# Allegro board LAYOUT.brd
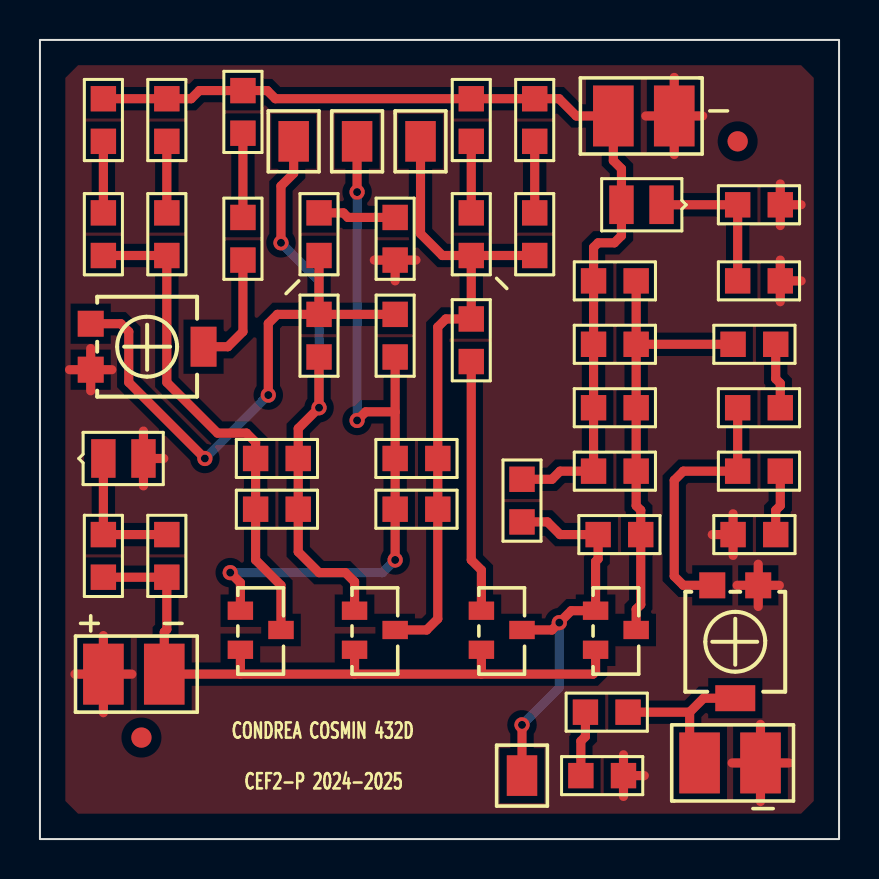
[diagram p0: board, top side]
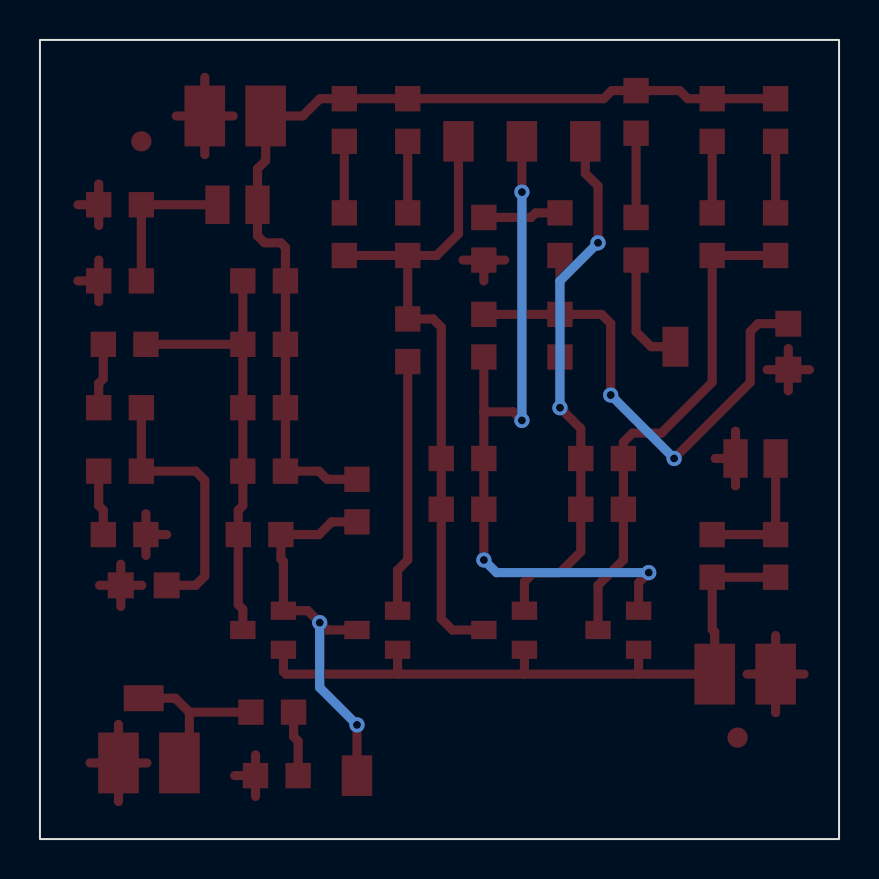
[diagram p1: board, bottom side, seen from below]

Outline 40 x 40 mm; copper layers: TOP, BOTTOM. Coordinates in mm from the lower left corner of the outline.
Outline path: rectangle 0,0 40,40

## Placement (name value [footprint] x y rotation side)
C1  1n  [SMC0805]  10.79 19.05 0 top
C2  1n  [SMC0805]  10.79 16.51 0 top
C3  1n  [SMC0805]  17.78 19.05 0 top
C4  1n  [SMC0805]  17.78 16.51 0 top
C5  47p  [SMC0805]  27.94 15.24 0 top
D1  1.85V  [SMD0805]  31.11 31.75 180 top
D2  1.85V  [SMD0805]  3.17 19.05 0 top
J1  CON1  [JUMPER1]  19.05 34.92 0 top
J2  CON1  [JUMPER1]  24.13 3.17 0 top
J3  CON1  [JUMPER1]  15.88 34.92 0 top
J4  CON1  [JUMPER1]  12.7 34.92 0 top
NOREF  -  []  40 0 90 top
NOREF#2  -  [unnamed#2]  5.08 5.08 0 top
NOREF#3  -  []  0 40 0 top
NOREF#4  -  [unnamed#2]  34.92 34.92 0 top
NOREF#5  -  []  0 0 90 top
NOREF#6  -  []  0 0 0 top
P1  10k  [TS53YL]  2.54 23.5 180 top
P2  100k  [TS53YL]  33.66 12.7 90 top
Q1  QBC817-25  [TO236]  10.16 11.43 180 top
Q2  QBC817-25  [TO236]  15.88 11.43 180 top
Q3  QBC846B  [TO236]  22.23 11.43 180 top
Q4  QBC846B  [TO236]  27.94 11.43 180 top
R1  1k  [SMR0805]  3.17 34.92 90 top
R2  1k  [SMR0805]  6.35 34.92 90 top
R3  1k  [SMR0805]  3.17 29.21 90 top
R4  1k  [SMR0805]  6.35 29.21 90 top
R5  8k200  [SMR0805]  13.97 24.13 90 top
R6  8k200  [SMR0805]  17.78 24.13 90 top
R7  1k  [SMR0805]  21.59 34.92 90 top
R8  1k  [SMR0805]  24.77 34.92 90 top
R9  1k  [SMR0805]  21.59 29.21 90 top
R10  1k  [SMR0805]  24.77 29.21 90 top
R11  100k  [SMR0805]  21.59 26.04 270 top
R12  3.3k  [SMR0805]  24.13 15.88 90 top
R13  3k9  [SMR0805]  29.84 27.94 180 top
R14  3k9  [SMR0805]  29.84 24.77 180 top
R15  3k9  [SMR0805]  29.84 21.59 180 top
R16  3k9  [SMR0805]  29.84 18.41 180 top
R17  10k  [SMR0805]  36.83 24.77 180 top
R18  8.2k  [SMR0805]  34.92 21.59 0 top
R19  15k  [SMR0805]  34.92 18.41 0 top
R20  10k  [SMR0805]  36.83 15.24 180 top
R21  330  [SMR0805]  10.16 37.47 270 top
R22  330  [SMR0805]  10.16 31.11 270 top
R23  3k3  [SMR0805]  13.97 29.21 90 top
R24  1k  [SMR0805]  17.78 31.11 270 top
R25  680  [SMR0805]  34.92 31.75 0 top
R26  680  [SMR0805]  34.92 27.94 0 top
R27  680  [SMR0805]  6.35 15.24 270 top
R28  680  [SMR0805]  3.17 15.24 270 top
RL1  6.8k  [SMR0805]  27.3 6.35 0 top
RL2  2.2k  [SMR0805]  29.21 3.17 180 top
VCC  CON2  [JUMPER2]  31.75 36.2 180 top
VO  CON2  [JUMPER2]  33.02 3.81 0 top
VSS  CON2  [JUMPER2]  3.17 8.26 0 top

## Library data of the parts
C1-C5 = C
D1 D2 = LED_0
J1-J4 = CON1: User Part Number: ***
P1 P2 = POT
Q1 Q2 = QBC817-25_0
Q3 Q4 = QBC846B_0
R1-R28 RL1 RL2 = R
VCC VO VSS = CON2: User Part Number: ***

## Footprints (pads in the part's own frame, mm; a bottom-side part is the same pattern mirrored in y, then rotated)
JUMPER1
  rect 1.524x2.032 smd: 1(0,0)
JUMPER2
  rect 2.032x3.048 smd: 1(0,0) 2(3.048,0)
SMC0805
  rect 1.27x1.27 smd: 1(0,0) 2(2.134,0)
SMD0805
  rect 1.219x1.93 smd: A(2.007,0) C(0,0)
SMR0805
  rect 1.27x1.27 smd: 1(0,0) 2(2.134,0)
TO236
  rect 1.27x0.914 smd: 1(0.127,0) 2(0.127,1.956) 3(-1.905,0.965)
TS53YL
  rect 1.3x1.3 smd: 1(0,0) 3(0,-2.3)
  rect 1.3x2 smd: 2(-5.65,-1.15)
unnamed#2
  round 1.016 smd: (0,0)

## Nets
VCC: D1.A(1) R1.2 R2.2 R7.2 R8.2 R12.2 R13.2 R14.2 R15.2 R16.2 R21.1 VCC.2
VSS: Q1.2 Q2.2 Q3.2 Q4.2 R27.2 R28.2 VSS.2
0: D2.A(1) P1.1 P2.3(2) R20.2 R24.2 R25.2 R26.2 RL2.1 VCC.1 VO.2 VSS.1
VO: P2.2(T) RL1.2 VO.1
VO1: C3.2 C4.2 J1.1 Q2.3 R9.1 R10.1 R11.1
VO2: Q3.1 R11.2
VO3: C5.1 J2.1 Q3.3 Q4.1 R12.1
VO4: C5.2 Q4.3 R13.1 R14.1 R15.1 R16.1 R17.2
N113110: D1.C(2) R25.1 R26.1
N113152: D2.C(2) R27.1 R28.1
N113324: R21.2 R22.1
N113400: P1.2(T) R22.2
N113538: P1.3(2) R5.2 R6.2 R23.1
N113756: R23.2 R24.1
N113810: R7.1 R9.2
N113816: R8.1 R10.2
N113844: R19.2 R20.1
N113900: R1.1 R3.2
N113906: R2.1 R4.2
N113998: P2.1 R18.1 R19.1
N114136: R17.1 R18.2
N114206: C1.1 C2.1 Q1.3 R3.1 R4.1
N114248: C1.2 C2.2 J4.1 Q2.1 R5.1
N114252: C3.1 C4.1 J3.1 Q1.1 R6.1
N114358: RL1.1 RL2.2

## Via types
v1: diameter 0.762, hole 0.4, TOP to BOTTOM, 10 vias

## Routing (per net, layer and track width the routed paths; a pad name or vN(x,y) marks a point on that pad's centre or on a via; arc(x,y) is an arc through that point)
VCC: length 49
  TOP w0.457: R1.2 R2.2 7.57,37.06 7.98,37.47 R21.1 11.38,37.47 11.79,37.06 R7.2 R8.2 25.98,37.06 26.85,36.2 VCC.2 28.7,33.96 29.11,33.55 D1.A 29.11,30.2 28.75,29.84 27.94,29.84 27.71,29.62 R13.2 R14.2 R15.2 R16.2 26.04,18.41 25.63,18.01 R12.2
VSS: length 34.5
  TOP w0.457: Q2.2 15.75,8.26 ; 15.75,8.26 22.1,8.26 ; 15.75,8.26 10.03,8.26 ; 22.1,8.26 Q3.2 ; 22.1,8.26 27.69,8.26 27.81,8.38 27.81,9.47 ; 10.03,8.26 VSS.2 6.22,10.36 6.35,10.49 R27.2 R28.2 ; 10.03,8.26 Q1.2
0: length 48
  TOP w0.457: 34.7,14.2 R20.2 ; R20.2 33.65,15.24 ; R20.2 34.7,16.28 ; 35.95,11.64 P2.3 ; P2.3 34.9,12.7 ; P2.3 35.95,13.76 ; P2.3 37.01,12.7 ; D2.A 6.2,19.05 ; D2.A 5.18,17.68 ; D2.A 5.18,20.42 ; VCC.1 33.17,36.2 ; VCC.1 30.33,36.2 ; VCC.1 31.75,34.26 ; VCC.1 31.75,38.13 ; R26.2 37.06,28.98 ; R26.2 37.06,26.9 ; R26.2 38.1,27.94 ; RL2.1 30.25,3.17 ; RL2.1 29.21,2.13 ; RL2.1 29.21,4.22 ; 1.75,8.26 VSS.1 ; VSS.1 4.6,8.26 ; VSS.1 3.17,6.32 ; VSS.1 3.17,10.19 ; P1.1 3.6,23.5 ; P1.1 2.54,24.55 ; P1.1 1.48,23.5 ; P1.1 2.54,22.44 ; R24.2 18.82,28.98 ; R24.2 16.74,28.98 ; R24.2 17.78,27.94 ; 36.07,1.88 VO.2 ; VO.2 36.07,5.74 ; VO.2 37.49,3.81 ; VO.2 34.65,3.81 ; 37.06,30.71 R25.2 ; R25.2 37.06,32.79 ; R25.2 38.1,31.75
VO: length 8.4
  TOP w0.457: P2.2 33.22,7.05 32.52,6.35 ; 32.52,6.35 32.52,4.94 33.02,4.44 VO.1 ; 32.52,6.35 RL1.2
VO1: length 32.8
  TOP w0.457: R9.1 R11.1 20.32,26.04 19.91,25.63 C3.2 C4.2 19.91,11.02 19.35,10.46 Q2.3 ; R9.1 20.14,29.21 19.05,30.3 J1.1 ; R9.1 R10.1
VO2: length 12.7
  TOP w0.457: Q3.1 22.1,13.46 21.59,13.97 R11.2
VO3: length 20.4
  TOP w0.457: R12.1 25.4,15.88 26.04,15.24 C5.1 27.94,14.02 27.81,13.89 27.81,11.43 26.59,11.43 v1(26,10.83) 25.63,10.46 Q3.3 ; v1(24.13,5.71) J2.1
  BOTTOM w0.457: v1(24.13,5.71) 26,7.58 v1(26,10.83)
VO4: length 22.5
  TOP w0.457: R17.2 R14.1 ; R14.1 R13.1 ; R14.1 R15.1 R16.1 29.84,16.69 30.07,16.46 C5.2 30.07,11.73 29.84,11.51 29.84,10.46
N113110: length 7.6
  TOP w0.457: R26.1 R25.1 D1.C
N113152: length 7
  TOP w0.457: D2.C R28.1 R27.1
N113324: length 4.2
  TOP w0.457: R21.2 R22.1
N113400: length 5.9
  TOP w0.457: R22.2 10.16,25.4 9.41,24.65 P1.2
N113538: length 27.6
  TOP w0.457: v1(8.26,19.05) 4.45,22.86 4.45,25.4 4.05,25.79 P1.3 ; v1(11.43,22.23) 11.43,25.81 11.89,26.26 R5.2 ; R23.1 R5.2 ; R5.2 R6.2
  BOTTOM w0.457: v1(8.26,19.05) v1(11.43,22.23)
N113756: length 3.9
  TOP w0.457: R23.2 15.19,31.34 15.42,31.11 R24.1
N113810: length 3.6
  TOP w0.457: R7.1 R9.2
N113816: length 3.6
  TOP w0.457: R8.1 R10.2
N113844: length 3.3
  TOP w0.457: R20.1 36.83,16.46 37.06,16.69 R19.2
N113900: length 3.6
  TOP w0.457: R1.1 R3.2
N113906: length 3.6
  TOP w0.457: R2.1 R4.2
N113998: length 13.4
  TOP w0.457: R18.1 R19.1 32.21,18.41 31.75,17.96 31.75,13.16 32.21,12.7 P2.1
N114136: length 3.3
  TOP w0.457: R17.1 36.83,23.04 37.06,22.81 R18.2
N114206: length 25.1
  TOP w0.457: Q1.3 12.06,12.7 10.79,13.97 C2.1 C1.1 10.79,19.86 10.34,20.32 8.89,20.32 6.35,22.86 R4.1 R3.1
N114248: length 29.5
  TOP w0.457: Q2.1 15.75,12.88 15.29,13.34 13.97,13.34 12.93,14.38 C2.2 C1.2 12.93,20.55 v1(13.97,21.59) R5.1 ; J4.1 12.7,33.32 12.06,32.69 v1(12.06,29.84)
  BOTTOM w0.457: v1(13.97,21.59) 13.97,27.94 v1(12.06,29.84)
N114252: length 36.8
  TOP w0.457: R6.1 17.78,21.38 ; 17.78,21.38 C3.1 C4.1 v1(17.78,13.97) ; 17.78,21.38 16.3,21.38 v1(15.88,20.95) ; Q1.1 10.03,12.83 v1(9.53,13.34) ; v1(15.88,32.38) J3.1
  BOTTOM w0.457: v1(17.78,13.97) 17.14,13.34 v1(9.53,13.34) ; v1(15.88,20.95) v1(15.88,32.38)
N114358: length 3.3
  TOP w0.457: RL2.2 27.08,4.9 27.3,5.13 RL1.1

## Copper pours and planes (outline as drawn; the poured copper is in the pictures)
0 on TOP: 1.27,38.1 1.91,38.73 38.1,38.73 38.73,38.1 38.73,1.91 38.1,1.27 1.91,1.27 1.27,1.91 ; 4 cut-outs

## Text on the board
Ref Des/Silkscreen Top: CONDREA COSMIN 432D | CEF2-P 2024-2025
XSECTION_CHART: *  SURFACE - AIR 0 MIL | L1: TOP CONDUCTOR - COPPER 0.71 MIL | *  DIELECTRIC - FR-4 61.57 MIL | L2: BOTTOM CONDUCTOR - COPPER 0.71 MIL | DESIGN CROSS SECTION CHART | ___________________________ | TOTAL THICKNESS 62.99 MIL | 1-2 | FIGURE | SIZE | 15.74 | DRILL CHART: TOP to BOTTOM | ALL UNITS ARE IN MILS | PLATED | QTY | 10
